# EAGLE board proto (EAGLE 6.6.0)
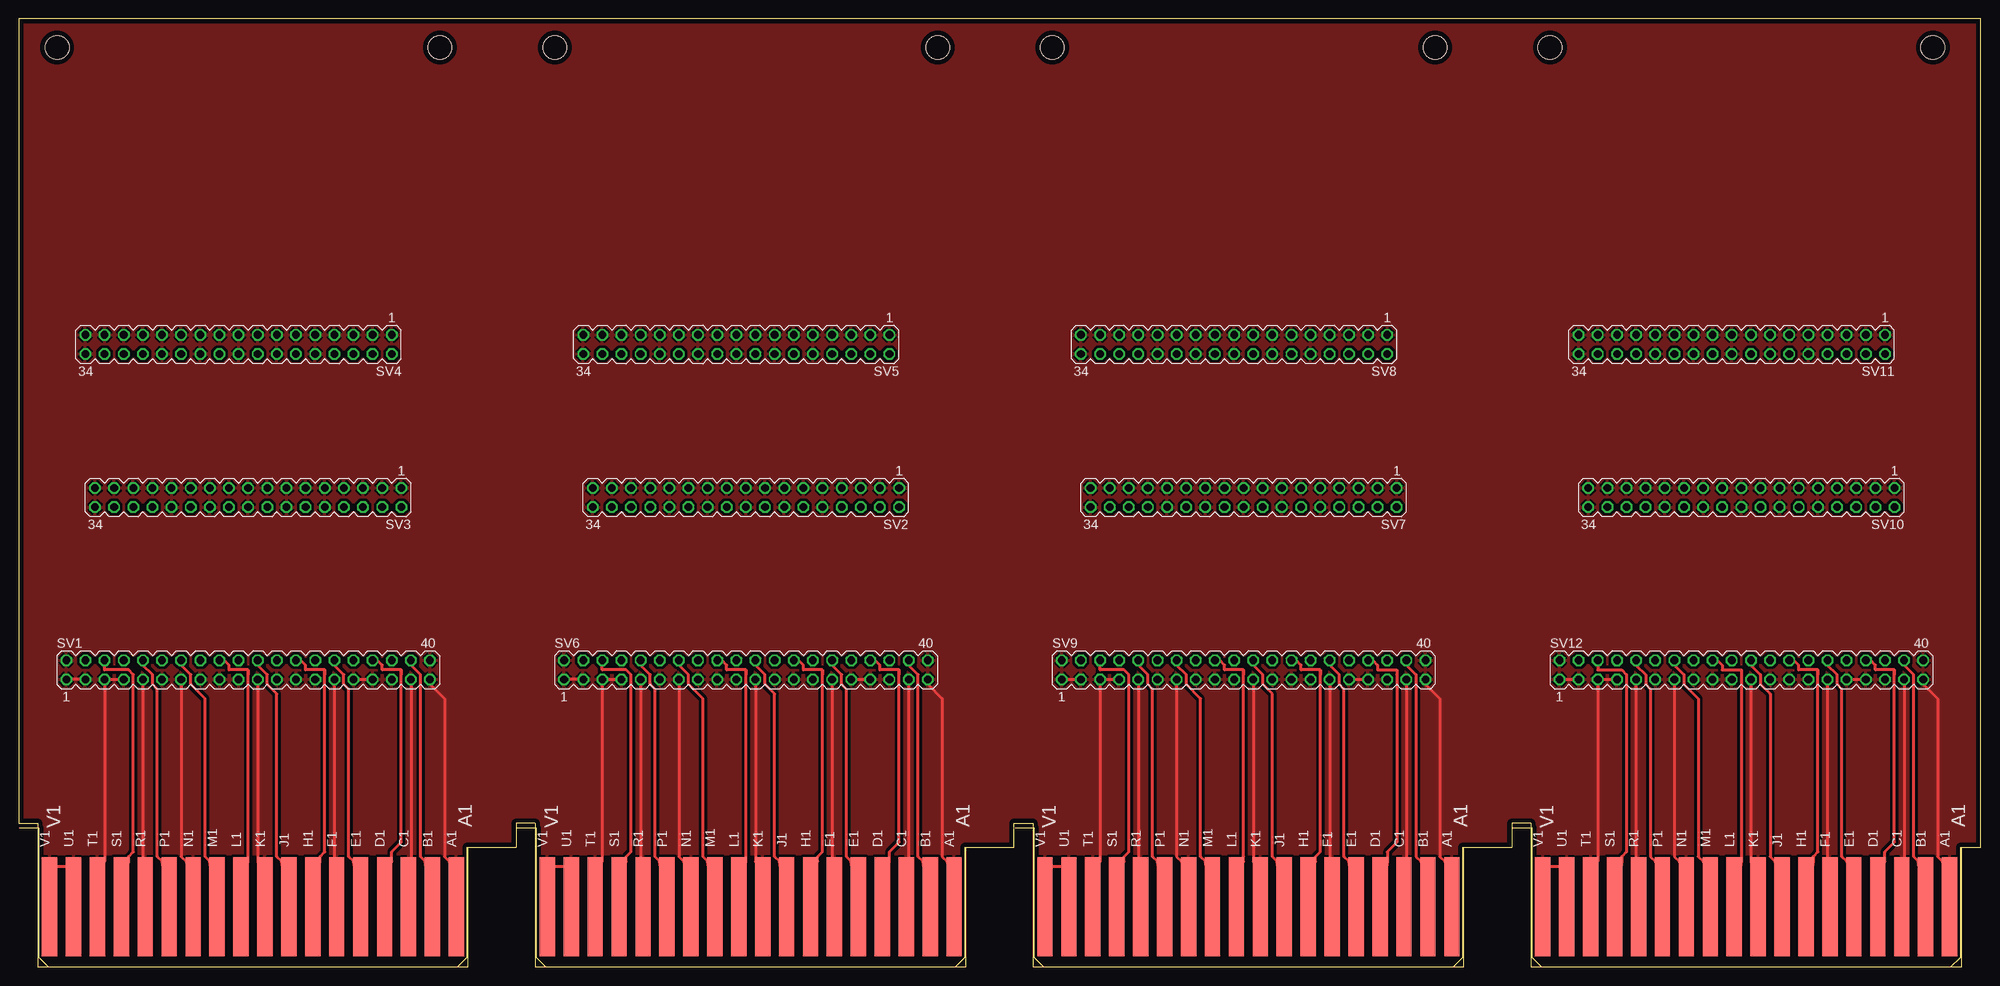
[diagram p0: board, top side]
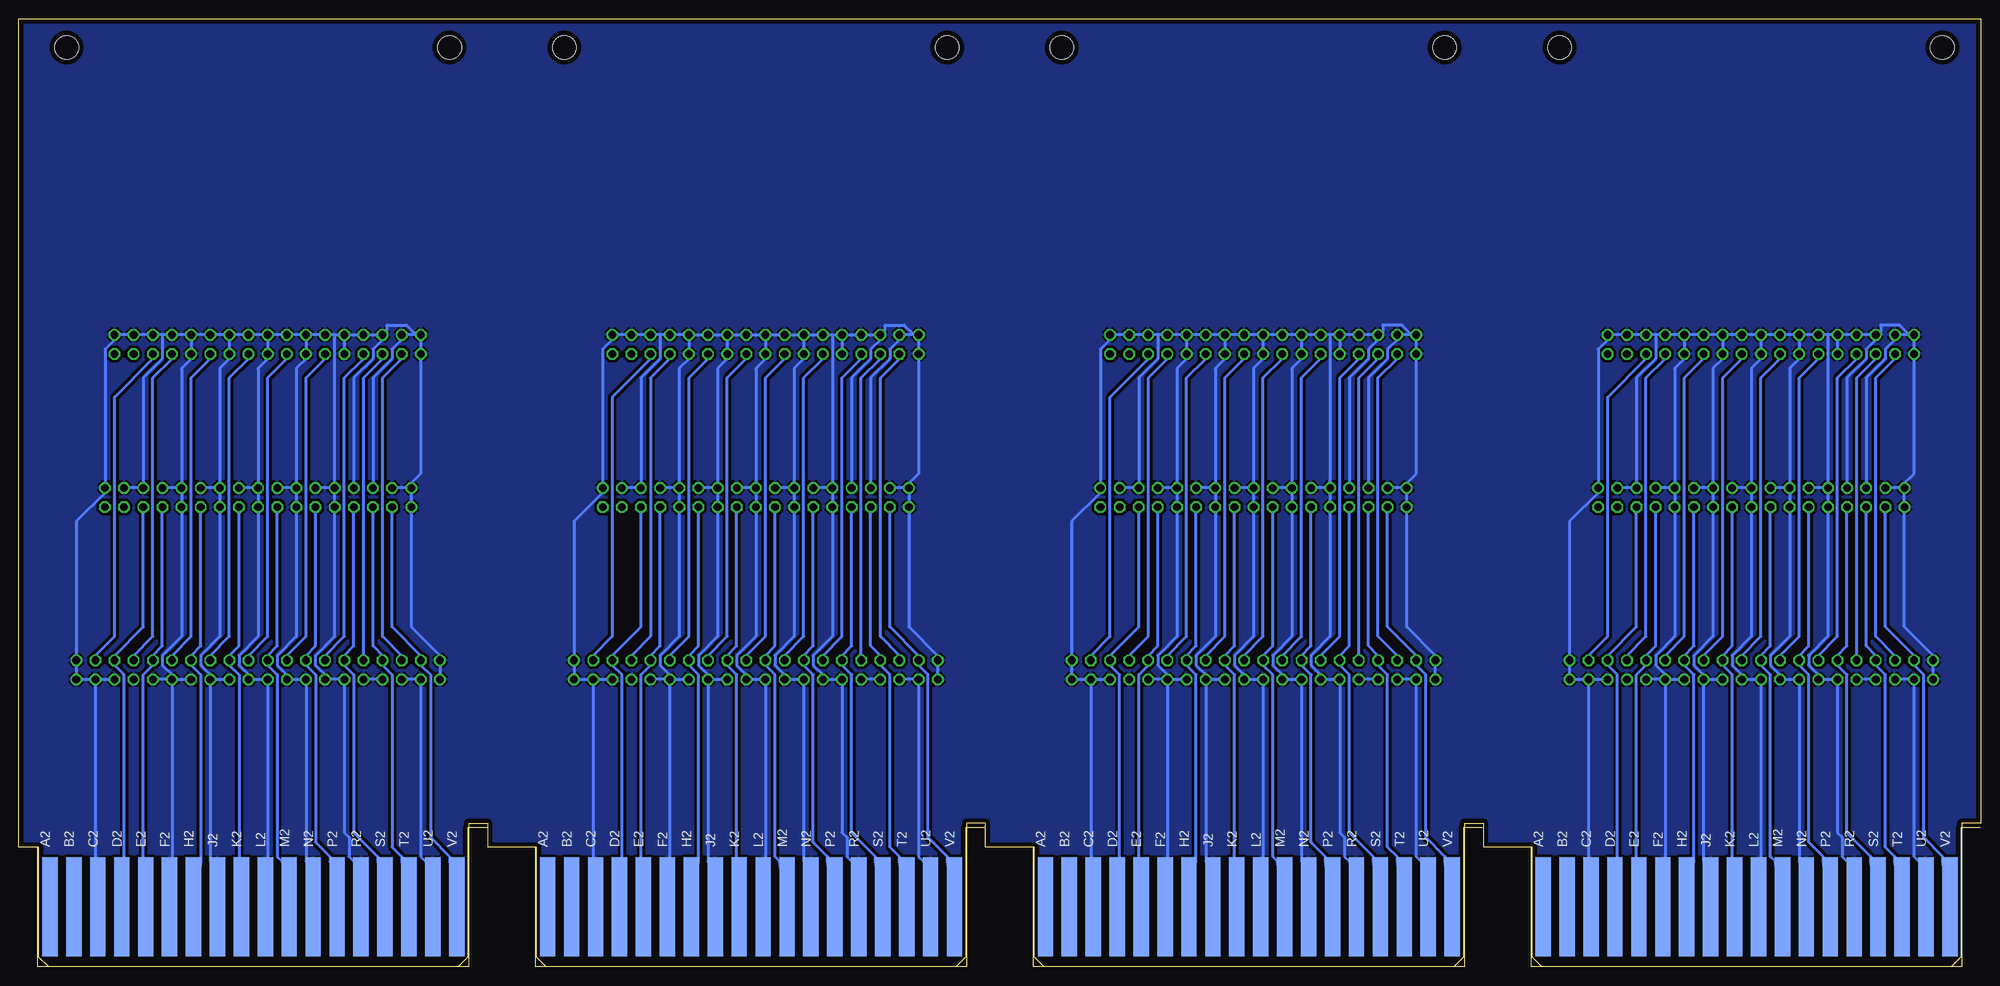
[diagram p1: board, bottom side, seen from below]

Size 260.3 x 125.73 mm. Coordinates in mm from the lower left corner, seen from the top.
Copper layers (1*16): Top 0.035mm / dielectric 1.5mm / Bottom 0.035mm
Design rules "olimex10mil": minimum track width 15mil, minimum drill 24mil, track to track 15mil, track to pad 10mil, pad to pad 10mil, via to via 10mil, smd to smd 10mil, copper to edge 25mil, drill to drill 10mil, minimum pad ring 10mil, minimum via ring 8mil, stop-mask expansion 0mil, vias tented up to drill 0mil, thermal gap 10mil

## Footprints (pad centres in the part's own frame; a part is rotated, then mirrored left to right if it is on the bottom)
DECPROTO = hole 3.175: 203.2,121.92; 254,121.92; 187.96,121.92; 137.16,121.92; 71.171,121.92; 121.971,121.92; 55.931,121.92; 5.131,121.92
MA20-2 = drill 1.016 octagon: 1 -24.13,-1.27; 2 -24.13,1.27; 3 -21.59,-1.27; 4 -21.59,1.27; 5 -19.05,-1.27; 6 -19.05,1.27; 7 -16.51,-1.27; 8 -16.51,1.27; 9 -13.97,-1.27; 10 -13.97,1.27; 11 -11.43,-1.27; 12 -11.43,1.27; 13 -8.89,-1.27; 14 -8.89,1.27; 15 -6.35,-1.27; 16 -6.35,1.27; 17 -3.81,-1.27; 18 -3.81,1.27; 19 -1.27,-1.27; 20 -1.27,1.27; 21 1.27,-1.27; 22 1.27,1.27; 23 3.81,-1.27; 24 3.81,1.27; 25 6.35,-1.27; 26 6.35,1.27; 27 8.89,-1.27; 28 8.89,1.27; 29 11.43,-1.27; 30 11.43,1.27; 31 13.97,-1.27; 32 13.97,1.27; 33 16.51,-1.27; 34 16.51,1.27; 35 19.05,-1.27; 36 19.05,1.27; 37 21.59,-1.27; 38 21.59,1.27; 39 24.13,-1.27; 40 24.13,1.27
MA17-2 = drill 1.016 octagon: 1 -20.32,-1.27; 2 -20.32,1.27; 3 -17.78,-1.27; 4 -17.78,1.27; 5 -15.24,-1.27; 6 -15.24,1.27; 7 -12.7,-1.27; 8 -12.7,1.27; 9 -10.16,-1.27; 10 -10.16,1.27; 11 -7.62,-1.27; 12 -7.62,1.27; 13 -5.08,-1.27; 14 -5.08,1.27; 15 -2.54,-1.27; 16 -2.54,1.27; 17 0,-1.27; 18 0,1.27; 19 2.54,-1.27; 20 2.54,1.27; 21 5.08,-1.27; 22 5.08,1.27; 23 7.62,-1.27; 24 7.62,1.27; 25 10.16,-1.27; 26 10.16,1.27; 27 12.7,-1.27; 28 12.7,1.27; 29 15.24,-1.27; 30 15.24,1.27; 31 17.78,-1.27; 32 17.78,1.27; 33 20.32,-1.27; 34 20.32,1.27
EDGE-CON2 = smd 13.106 x 2.032: A1 7.938,4.128; B1 7.938,7.303; C1 7.938,10.477; D1 7.938,13.652; E1 7.938,16.828; F1 7.938,20.003; H1 7.938,23.177; J1 7.938,26.352; K1 7.938,29.527; L1 7.938,32.703; M1 7.938,35.877; N1 7.938,39.053; P1 7.938,42.227; R1 7.938,45.403; S1 7.938,48.578; T1 7.938,51.752; U1 7.938,54.928; V1 7.938,58.102 | smd 13.106 x 2.032 bottom: A2 7.938,4.128; B2 7.938,7.303; C2 7.938,10.477; D2 7.938,13.652; E2 7.938,16.828; F2 7.938,20.003; H2 7.938,23.177; J2 7.938,26.352; K2 7.938,29.527; L2 7.938,32.703; M2 7.938,35.877; N2 7.938,39.053; P2 7.938,42.227; R2 7.938,45.403; S2 7.938,48.578; T2 7.938,51.752; U2 7.938,54.928; V2 7.938,58.102

## Placement (x,y rotation side)
E$1  [DECPROTO]  -0.05,0 0 top
SV1  [MA20-2]  30.43,39.37 0 top
SV2  [MA17-2]  96.47,62.23 180 top
SV3  [MA17-2]  30.43,62.23 180 top
SV4  [MA17-2]  29.16,82.55 180 top
SV5  [MA17-2]  95.2,82.55 180 top
SV6  [MA20-2]  96.47,39.37 0 top
SV7  [MA17-2]  162.51,62.23 180 top
SV8  [MA17-2]  161.24,82.55 180 top
SV9  [MA20-2]  162.51,39.37 0 top
SV10  [MA17-2]  228.55,62.23 180 top
SV11  [MA17-2]  227.28,82.55 180 top
SV12  [MA20-2]  228.55,39.37 0 top
U$1  [EDGE-CON2]  194.26,0 90 top
U$2  [EDGE-CON2]  62.18,0 90 top
U$3  [EDGE-CON2]  128.22,0 90 top
U$5  [EDGE-CON2]  260.3,0 90 top

## Library data of the parts
E$1 U$1-U$3 U$5 = dec-con
SV1-SV12 = con-lstb

## Nets
-15V: U$2.B2
-15V1: U$3.B2
-15V2: U$1.B2
-15V3: U$5.B2
B1: SV1.38 SV4.6 U$2.B1
B2: SV5.6 SV6.38 U$3.B1
B3: SV8.6 SV9.38 U$1.B1
B4: SV11.6 SV12.38 U$5.B1
D1: SV1.34 SV4.8 U$2.D1
D2: SV1.36 SV3.6 U$2.D2
D3: SV2.6 SV6.36 U$3.D2
D4: SV5.8 SV6.34 U$3.D1
D5: SV7.6 SV9.36 U$1.D2
D6: SV8.8 SV9.34 U$1.D1
D7: SV10.6 SV12.36 U$5.D2
D8: SV11.8 SV12.34 U$5.D1
E1: SV1.30 SV4.12 U$2.E1
E2: SV1.32 SV3.8 U$2.E2
E3: SV2.8 SV6.32 U$3.E2
E4: SV5.12 SV6.30 U$3.E1
E5: SV7.8 SV9.32 U$1.E2
E6: SV8.12 SV9.30 U$1.E1
E7: SV10.8 SV12.32 U$5.E2
E8: SV11.12 SV12.30 U$5.E1
GND: SV1.1 SV1.2 SV1.3 SV1.5 SV1.7 SV1.9 SV1.11 SV1.13 SV1.15 SV1.17 SV1.19 SV1.21 SV1.23 SV1.25 SV1.27 SV1.29 SV1.31 SV1.33 SV1.35 SV1.37 SV1.39 SV1.40 SV2.1 SV2.3 SV2.5 SV2.7 SV2.9 SV2.10 SV2.11 SV2.13 SV2.14 SV2.15 SV2.17 SV2.18 SV2.19 SV2.21 SV2.22 SV2.23 SV2.25 SV2.26 SV2.27 SV2.29 SV2.31 SV2.33 SV2.34 SV3.1 SV3.3 SV3.5 SV3.7 SV3.9 SV3.10 SV3.11 SV3.13 SV3.14 SV3.15 SV3.17 SV3.18 SV3.19 SV3.21 SV3.22 SV3.23 SV3.25 SV3.26 SV3.27 SV3.29 SV3.31 SV3.33 SV3.34 SV4.1 SV4.3 SV4.5 SV4.7 SV4.9 SV4.10 SV4.11 SV4.13 SV4.14 SV4.15 SV4.17 SV4.18 SV4.19 SV4.21 SV4.22 SV4.23 SV4.25 SV4.26 SV4.27 SV4.29 SV4.31 SV4.33 SV4.34 SV5.1 SV5.3 SV5.5 SV5.7 SV5.9 SV5.10 SV5.11 SV5.13 SV5.14 SV5.15 SV5.17 SV5.18 SV5.19 SV5.21 SV5.22 SV5.23 SV5.25 SV5.26 SV5.27 SV5.29 SV5.31 SV5.33 SV5.34 SV6.1 SV6.2 SV6.3 SV6.5 SV6.7 SV6.9 SV6.11 SV6.13 SV6.15 SV6.17 SV6.19 SV6.21 SV6.23 SV6.25 SV6.27 SV6.29 SV6.31 SV6.33 SV6.35 SV6.37 SV6.39 SV6.40 SV7.1 SV7.3 SV7.5 SV7.7 SV7.9 SV7.10 SV7.11 SV7.13 SV7.14 SV7.15 SV7.17 SV7.18 SV7.19 SV7.21 SV7.22 SV7.23 SV7.25 SV7.26 SV7.27 SV7.29 SV7.31 SV7.33 SV7.34 SV8.1 SV8.3 SV8.5 SV8.7 SV8.9 SV8.10 SV8.11 SV8.13 SV8.14 SV8.15 SV8.17 SV8.18 SV8.19 SV8.21 SV8.22 SV8.23 SV8.25 SV8.26 SV8.27 SV8.29 SV8.31 SV8.33 SV8.34 SV9.1 SV9.2 SV9.3 SV9.5 SV9.7 SV9.9 SV9.11 SV9.13 SV9.15 SV9.17 SV9.19 SV9.21 SV9.23 SV9.25 SV9.27 SV9.29 SV9.31 SV9.33 SV9.35 SV9.37 SV9.39 SV9.40 SV10.1 SV10.3 SV10.5 SV10.7 SV10.9 SV10.10 SV10.11 SV10.13 SV10.14 SV10.15 SV10.17 SV10.18 SV10.19 SV10.21 SV10.22 SV10.23 SV10.25 SV10.26 SV10.27 SV10.29 SV10.31 SV10.33 SV10.34 SV11.1 SV11.3 SV11.5 SV11.7 SV11.9 SV11.10 SV11.11 SV11.13 SV11.14 SV11.15 SV11.17 SV11.18 SV11.19 SV11.21 SV11.22 SV11.23 SV11.25 SV11.26 SV11.27 SV11.29 SV11.31 SV11.33 SV11.34 SV12.1 SV12.2 SV12.3 SV12.5 SV12.7 SV12.9 SV12.11 SV12.13 SV12.15 SV12.17 SV12.19 SV12.21 SV12.23 SV12.25 SV12.27 SV12.29 SV12.31 SV12.33 SV12.35 SV12.37 SV12.39 SV12.40 U$1.A1 U$1.C1 U$1.C2 U$1.F1 U$1.F2 U$1.J2 U$1.K1 U$1.L2 U$1.N1 U$1.N2 U$1.R1 U$1.R2 U$1.T1 U$1.U1 U$1.U2 U$1.V1 U$2.A1 U$2.C1 U$2.C2 U$2.F1 U$2.F2 U$2.J2 U$2.K1 U$2.L2 U$2.N1 U$2.N2 U$2.R1 U$2.R2 U$2.T1 U$2.U1 U$2.U2 U$2.V1 U$3.A1 U$3.C1 U$3.C2 U$3.F1 U$3.F2 U$3.J2 U$3.K1 U$3.L2 U$3.N1 U$3.N2 U$3.R1 U$3.R2 U$3.T1 U$3.U1 U$3.U2 U$3.V1 U$5.A1 U$5.C1 U$5.C2 U$5.F1 U$5.F2 U$5.J2 U$5.K1 U$5.L2 U$5.N1 U$5.N2 U$5.R1 U$5.R2 U$5.T1 U$5.U1 U$5.U2 U$5.V1
H1: SV1.26 SV4.16 U$2.H1
H2: SV1.28 SV3.12 U$2.H2
H3: SV2.12 SV6.28 U$3.H2
H4: SV5.16 SV6.26 U$3.H1
H5: SV7.12 SV9.28 U$1.H2
H6: SV8.16 SV9.26 U$1.H1
H7: SV10.12 SV12.28 U$5.H2
H8: SV11.16 SV12.26 U$5.H1
J1: SV1.22 SV4.20 U$2.J1
J2: SV5.20 SV6.22 U$3.J1
J3: SV8.20 SV9.22 U$1.J1
J4: SV11.20 SV12.22 U$5.J1
K1: SV2.16 SV6.24 U$3.K2
K2: SV1.24 SV3.16 U$2.K2
K3: SV7.16 SV9.24 U$1.K2
K4: SV10.16 SV12.24 U$5.K2
L1: SV1.18 SV4.24 U$2.L1
L2: SV5.24 SV6.18 U$3.L1
L3: SV8.24 SV9.18 U$1.L1
L4: SV11.24 SV12.18 U$5.L1
M1: SV1.14 SV4.28 U$2.M1
M2: SV1.20 SV3.20 U$2.M2
M3: SV2.20 SV6.20 U$3.M2
M4: SV5.28 SV6.14 U$3.M1
M5: SV7.20 SV9.20 U$1.M2
M6: SV8.28 SV9.14 U$1.M1
M7: SV10.20 SV12.20 U$5.M2
M8: SV11.28 SV12.14 U$5.M1
P1: SV1.10 SV4.30 U$2.P1
P2: SV1.16 SV3.24 U$2.P2
P3: SV2.24 SV6.16 U$3.P2
P4: SV5.30 SV6.10 U$3.P1
P5: SV7.24 SV9.16 U$1.P2
P6: SV8.30 SV9.10 U$1.P1
P7: SV10.24 SV12.16 U$5.P2
P8: SV11.30 SV12.10 U$5.P1
S1: SV1.6 SV4.32 U$2.S1
S2: SV1.12 SV3.28 U$2.S2
S3: SV2.28 SV6.12 U$3.S2
S4: SV5.32 SV6.6 U$3.S1
S5: SV7.28 SV9.12 U$1.S2
S6: SV8.32 SV9.6 U$1.S1
S7: SV10.28 SV12.12 U$5.S2
S8: SV11.32 SV12.6 U$5.S1
T1: SV2.30 SV6.8 U$3.T2
T2: SV1.8 SV3.30 U$2.T2
T3: SV7.30 SV9.8 U$1.T2
T4: SV10.30 SV12.8 U$5.T2
V1: SV2.32 SV6.4 U$3.V2
V2: SV1.4 SV3.32 U$2.V2
V3: SV7.32 SV9.4 U$1.V2
V4: SV10.32 SV12.4 U$5.V2
VCC: U$2.A2
VCC1: U$3.A2
VCC2: U$1.A2
VCC3: U$5.A2

## Tracks (layer width: path | path; a pad name or v marks a point on that pad's centre or on a via)
B1
  Top 0.381: SV1.38 52.02,40.01 53.29,38.74 53.29,14.61 53.92,13.97 U$2.B1
  Bottom 0.381: SV1.38 52.02,41.28 49.48,43.82 49.48,75.57 44.4,80.65 SV4.6
B2
  Top 0.381: SV6.38 118.06,40.01 119.33,38.74 119.33,14.61 119.96,13.97 U$3.B1
  Bottom 0.381: SV6.38 118.06,41.28 115.52,43.82 115.52,75.57 110.44,80.65 SV5.6
B3
  Top 0.381: SV9.38 184.1,40.01 185.37,38.74 185.37,14.61 186,13.97 U$1.B1
  Bottom 0.381: SV9.38 184.1,41.28 181.56,43.82 181.56,75.57 176.48,80.65 SV8.6
B4
  Top 0.381: SV12.38 250.14,40.01 251.41,38.74 251.41,14.61 252.04,13.97 U$5.B1
  Bottom 0.381: SV12.38 250.14,41.28 247.6,43.82 247.6,75.57 242.52,80.65 SV11.6
D1
  Top 0.381: 50.75,39.37 50.75,16.51 49.48,15.24 49.48,13.97 U$2.D1 | 50.75,39.37 50.75,38.74 | 50.75,39.37 48.21,39.37 48.21,40.01 47.57,40.64 SV1.34
  Bottom 0.381: SV1.34 46.94,41.28 44.4,43.82 44.4,78.11 41.86,80.65 SV4.8
D2
  Bottom 0.381: SV3.6 45.67,60.33 45.67,45.09 49.48,41.28 SV1.36 49.48,40.01 48.21,38.74 48.21,13.97 U$2.D2
D3
  Bottom 0.381: SV2.6 111.71,60.33 111.71,45.09 115.52,41.28 SV6.36 115.52,40.01 114.25,38.74 114.25,13.97 U$3.D2
D4
  Top 0.381: 116.79,39.37 116.79,16.51 115.52,15.24 115.52,13.97 U$3.D1 | 116.79,39.37 116.79,38.74 | 116.79,39.37 114.25,39.37 114.25,40.01 113.61,40.64 SV6.34
  Bottom 0.381: SV6.34 112.98,41.28 110.44,43.82 110.44,78.11 107.9,80.65 SV5.8
D5
  Bottom 0.381: SV7.6 177.75,60.33 177.75,45.09 181.56,41.28 SV9.36 181.56,40.01 180.29,38.74 180.29,13.97 U$1.D2
D6
  Top 0.381: 182.83,39.37 182.83,16.51 181.56,15.24 181.56,13.97 U$1.D1 | 182.83,39.37 182.83,38.74 | 182.83,39.37 180.29,39.37 180.29,40.01 179.65,40.64 SV9.34
  Bottom 0.381: SV9.34 179.02,41.28 176.48,43.82 176.48,78.11 173.94,80.65 SV8.8
D7
  Bottom 0.381: SV10.6 243.79,60.33 243.79,45.09 247.6,41.28 SV12.36 247.6,40.01 246.33,38.74 246.33,13.97 U$5.D2
D8
  Top 0.381: 248.87,39.37 248.87,16.51 247.6,15.24 247.6,13.97 U$5.D1 | 248.87,39.37 248.87,38.74 | 248.87,39.37 246.33,39.37 246.33,40.01 245.69,40.64 SV12.34
  Bottom 0.381: SV12.34 245.06,41.28 242.52,43.82 242.52,78.11 239.98,80.65 SV11.8
E1
  Top 0.381: SV1.30 41.86,40.01 43.13,38.74 43.13,37.47 43.76,36.83 43.76,14.61 44.4,13.97 U$2.E1
  Bottom 0.381: SV1.30 41.86,41.28 39.32,43.82 39.32,78.11 36.78,80.65 SV4.12
E2
  Bottom 0.381: SV3.8 43.13,60.33 43.13,42.55 44.4,41.28 SV1.32 44.4,40.01 45.67,38.74 45.67,13.97 U$2.E2
E3
  Bottom 0.381: SV2.8 109.17,60.33 109.17,42.55 110.44,41.28 SV6.32 110.44,40.01 111.71,38.74 111.71,13.97 U$3.E2
E4
  Top 0.381: SV6.30 107.9,40.01 109.17,38.74 109.17,37.47 109.8,36.83 109.8,14.61 110.44,13.97 U$3.E1
  Bottom 0.381: SV6.30 107.9,41.28 105.36,43.82 105.36,78.11 102.82,80.65 SV5.12
E5
  Bottom 0.381: SV7.8 175.21,60.33 175.21,42.55 176.48,41.28 SV9.32 176.48,40.01 177.75,38.74 177.75,13.97 U$1.E2
E6
  Top 0.381: SV9.30 173.94,40.01 175.21,38.74 175.21,37.47 175.84,36.83 175.84,14.61 176.48,13.97 U$1.E1
  Bottom 0.381: SV9.30 173.94,41.28 171.4,43.82 171.4,78.11 168.86,80.65 SV8.12
E7
  Bottom 0.381: SV10.8 241.25,60.33 241.25,42.55 242.52,41.28 SV12.32 242.52,40.01 243.79,38.74 243.79,13.97 U$5.E2
E8
  Top 0.381: SV12.30 239.98,40.01 241.25,38.74 241.25,37.47 241.88,36.83 241.88,14.61 242.52,13.97 U$5.E1
  Bottom 0.381: SV12.30 239.98,41.28 237.44,43.82 237.44,78.11 234.9,80.65 SV11.12
GND
  Top 0.381: 11.38,13.97 11.38,37.47 SV1.5 12.01,38.1 13.28,38.1 SV1.7 | SV1.9 16.46,37.47 16.46,13.97 U$2.R1 | SV1.3 8.2,38.1 6.93,38.1 SV1.1 | 52.02,13.97 52.02,37.47 SV1.37 | SV1.39 54.56,37.47 56.46,35.56 56.46,14.61 57.1,13.97 U$2.A1 | SV1.21 31.7,37.47 31.7,13.97 U$2.K1 | SV1.33 46.3,38.1 45.03,38.1 SV1.31 | SV1.29 41.86,37.47 41.86,13.97 U$2.F1 | SV1.13 21.54,37.47 21.54,14.61 22.17,13.97 U$2.N1 | 3.95,13.97 3.76,13.97 U$2.V1 5.03,13.34 6.3,13.34 U$2.U1 | U$2.T1 10.11,13.97 10.24,13.97 | U$2.C1 51.38,13.97 51.5,13.97 | 77.42,13.97 77.42,37.47 SV6.5 78.05,38.1 79.32,38.1 SV6.7 | SV6.9 82.5,37.47 82.5,13.97 U$3.R1 | SV6.3 74.24,38.1 72.97,38.1 SV6.1 | 118.06,13.97 118.06,37.47 SV6.37 | SV6.39 120.6,37.47 122.5,35.56 122.5,14.61 123.14,13.97 U$3.A1 | SV6.21 97.74,37.47 97.74,13.97 U$3.K1 | SV6.33 112.34,38.1 111.07,38.1 SV6.31 | SV6.29 107.9,37.47 107.9,13.97 U$3.F1 | SV6.13 87.58,37.47 87.58,14.61 88.21,13.97 U$3.N1 | 69.99,13.97 69.8,13.97 U$3.V1 71.07,13.34 72.34,13.34 U$3.U1 | U$3.T1 76.15,13.97 76.28,13.97 | U$3.C1 117.42,13.97 117.54,13.97 | 143.46,13.97 143.46,37.47 SV9.5 144.09,38.1 145.36,38.1 SV9.7 | SV9.9 148.54,37.47 148.54,13.97 U$1.R1 | SV9.3 140.28,38.1 139.01,38.1 SV9.1 | 184.1,13.97 184.1,37.47 SV9.37 | SV9.39 186.64,37.47 188.54,35.56 188.54,14.61 189.18,13.97 U$1.A1 | SV9.21 163.78,37.47 163.78,13.97 U$1.K1 | SV9.33 178.38,38.1 177.11,38.1 SV9.31 | SV9.29 173.94,37.47 173.94,13.97 U$1.F1 | SV9.13 153.62,37.47 153.62,14.61 154.25,13.97 U$1.N1 | 136.03,13.97 135.84,13.97 U$1.V1 137.11,13.34 138.38,13.34 U$1.U1 | U$1.T1 142.19,13.97 142.32,13.97 | U$1.C1 183.46,13.97 183.58,13.97
  Top 0.381: 209.5,13.97 209.5,37.47 SV12.5 210.13,38.1 211.4,38.1 SV12.7 | SV12.9 214.58,37.47 214.58,13.97 U$5.R1 | SV12.3 206.32,38.1 205.05,38.1 SV12.1 | 250.14,13.97 250.14,37.47 SV12.37 | SV12.39 252.68,37.47 254.58,35.56 254.58,14.61 255.22,13.97 U$5.A1 | SV12.21 229.82,37.47 229.82,13.97 U$5.K1 | SV12.33 244.42,38.1 243.15,38.1 SV12.31 | SV12.29 239.98,37.47 239.98,13.97 U$5.F1 | SV12.13 219.66,37.47 219.66,14.61 220.29,13.97 U$5.N1 | 202.07,13.97 201.88,13.97 U$5.V1 203.15,13.34 204.42,13.34 U$5.U1 | U$5.T1 208.23,13.97 208.36,13.97 | U$5.C1 249.5,13.97 249.62,13.97
  Bottom 0.381: SV1.5 10.74,38.1 9.47,38.1 SV1.3 8.84,37.47 8.84,14.61 8.2,13.97 | SV1.9 15.82,38.1 14.55,38.1 SV1.7 | SV1.1 6.3,38.74 6.3,40.01 SV1.2 6.3,41.28 10.11,45.09 10.11,60.33 SV3.34 10.11,61.6 10.11,62.87 SV3.33 | SV3.31 12.01,63.5 10.74,63.5 SV3.33 | SV4.33 8.84,83.19 8.84,81.92 SV4.34 8.84,80.65 8.84,65.41 10.11,64.14 SV3.33 | SV3.29 15.19,64.14 15.19,78.11 12.65,80.65 12.65,81.92 11.38,83.19 SV4.31 10.74,83.82 9.47,83.82 | SV4.33 9.47,83.82 | SV1.37 52.65,38.1 53.92,38.1 SV1.39 54.56,38.74 54.56,40.01 SV1.40 54.56,41.28 54.56,59.06 50.75,62.87 SV3.1 50.75,64.14 50.75,81.92 49.48,83.19 SV4.1 48.84,83.82 47.57,83.82 SV4.3 46.3,83.82 45.03,83.82 SV4.5 43.76,83.82 43.13,83.82 | SV1.35 50.11,38.1 51.38,38.1 SV1.37 | 52.02,13.97 52.02,37.47 SV1.37 | SV1.29 42.49,38.1 43.76,38.1 SV1.31 | SV1.27 39.95,38.1 41.22,38.1 SV1.29 | SV1.29 41.86,37.47 41.86,13.97 U$2.F1 | SV1.25 36.14,38.1 34.87,38.1 SV1.23 | 36.78,13.97 36.78,37.47 SV1.25 | 24.08,13.97 24.08,37.47 SV1.15 24.71,38.1 25.98,38.1 SV1.17 26.62,38.74 27.89,40.01 27.89,41.28 25.35,43.82 25.35,60.33 SV3.22 25.35,61.6 25.35,62.87 SV3.21 | SV3.13 35.51,62.87 35.51,61.6 SV3.14 35.51,60.33 35.51,43.82 38.05,41.28 38.05,40.01 36.78,38.74 SV1.25 | SV3.11 37.41,63.5 36.14,63.5 SV3.13 | SV4.13 34.24,83.19 34.24,81.92 SV4.14 34.24,80.65 35.51,79.38 35.51,64.14 SV3.13 | SV4.13 33.6,83.82 32.33,83.82 SV4.15 31.06,83.82 29.79,83.82 SV4.17 | SV3.17 30.43,62.87 30.43,61.6 SV3.18 30.43,60.33 30.43,43.82 32.97,41.28 32.97,40.01 31.7,38.74 SV1.21 31.06,38.1 29.79,38.1 SV1.19 29.16,37.47 29.16,13.97 U$2.L2 | SV3.15 32.33,63.5 31.06,63.5 SV3.17
  Bottom 0.381: SV4.17 29.16,83.19 29.16,81.92 SV4.18 29.16,80.65 30.43,79.38 30.43,64.14 SV3.17 | SV4.17 28.52,83.82 27.25,83.82 SV4.19 25.98,83.82 24.71,83.82 SV4.21 | SV3.3 47.57,63.5 46.3,63.5 SV3.5 45.67,64.14 45.67,78.11 43.13,80.65 43.13,83.82 | 43.13,83.82 42.49,83.82 SV4.7 41.22,83.82 39.95,83.82 SV4.9 | SV3.9 40.59,62.87 40.59,61.6 SV3.10 40.59,60.33 40.59,43.82 43.13,41.28 43.13,40.01 41.86,38.74 SV1.29 | SV3.7 42.49,63.5 41.22,63.5 SV3.9 | SV4.9 39.32,83.19 39.32,81.92 SV4.10 39.32,80.65 40.59,79.38 40.59,64.14 SV3.9 | SV4.9 38.68,83.82 37.41,83.82 SV4.11 36.14,83.82 34.87,83.82 SV4.13 | SV3.23 22.17,63.5 20.9,63.5 SV3.25 | SV3.25 20.27,62.87 20.27,61.6 SV3.26 20.27,60.33 20.27,43.82 22.81,41.28 22.81,40.01 21.54,38.74 SV1.13 20.9,38.1 19.63,38.1 SV1.11 19,37.47 19,17.78 18.36,17.15 18.36,14.61 17.73,13.97 | SV4.26 19,81.92 19,83.19 SV4.25 | SV4.25 18.36,83.82 17.09,83.82 SV4.27 15.82,83.82 14.55,83.82 SV4.29 | SV3.27 17.73,64.14 17.73,78.11 15.19,80.65 15.19,81.92 13.92,83.19 SV4.29 | SV3.19 27.25,63.5 25.98,63.5 SV3.21 | SV4.21 24.08,83.19 24.08,81.92 SV4.22 24.08,80.65 25.35,79.38 25.35,64.14 SV3.21 | SV4.21 23.44,83.82 22.17,83.82 SV4.23 20.9,83.82 20.27,83.82 | 20.27,83.82 19.63,83.82 SV4.25 | 20.27,83.82 20.27,64.14 SV3.25 | 9.47,83.82 10.74,85.09 13.28,85.09 13.28,83.82 SV4.29 | SV4.33 9.47,83.82 | U$2.U1 6.93,13.97 7.01,13.97 | U$2.R1 16.46,13.97 16.59,13.97 | U$2.N1 22.81,13.97 22.94,13.97 | U$2.J2 35.51,13.97 35.64,13.97 | U$2.C1 51.38,13.97 51.49,13.97 | SV6.5 76.78,38.1 75.51,38.1 SV6.3 74.88,37.47 74.88,14.61 74.24,13.97 | SV6.9 81.86,38.1 80.59,38.1 SV6.7
  Bottom 0.381: SV6.1 72.34,38.74 72.34,40.01 SV6.2 72.34,41.28 76.15,45.09 76.15,60.33 SV2.34 76.15,61.6 76.15,62.87 SV2.33 | SV2.31 78.05,63.5 76.78,63.5 SV2.33 | SV5.33 74.88,83.19 74.88,81.92 SV5.34 74.88,80.65 74.88,65.41 76.15,64.14 SV2.33 | SV2.29 81.23,64.14 81.23,78.11 78.69,80.65 78.69,81.92 77.42,83.19 SV5.31 76.78,83.82 75.51,83.82 | SV5.33 75.51,83.82 | SV6.37 118.69,38.1 119.96,38.1 SV6.39 120.6,38.74 120.6,40.01 SV6.40 120.6,41.28 120.6,59.06 116.79,62.87 SV2.1 116.79,64.14 116.79,81.92 115.52,83.19 SV5.1 114.88,83.82 113.61,83.82 SV5.3 112.34,83.82 111.07,83.82 SV5.5 109.8,83.82 109.17,83.82 | SV6.35 116.15,38.1 117.42,38.1 SV6.37 | 118.06,13.97 118.06,37.47 SV6.37 | SV6.29 108.53,38.1 109.8,38.1 SV6.31 | SV6.27 105.99,38.1 107.26,38.1 SV6.29 | SV6.29 107.9,37.47 107.9,13.97 U$3.F1 | SV6.25 102.18,38.1 100.91,38.1 SV6.23 | 102.82,13.97 102.82,37.47 SV6.25 | 90.12,13.97 90.12,37.47 SV6.15 90.75,38.1 92.02,38.1 SV6.17 92.66,38.74 93.93,40.01 93.93,41.28 91.39,43.82 91.39,60.33 SV2.22 91.39,61.6 91.39,62.87 SV2.21 | SV2.13 101.55,62.87 101.55,61.6 SV2.14 101.55,60.33 101.55,43.82 104.09,41.28 104.09,40.01 102.82,38.74 SV6.25 | SV2.11 103.45,63.5 102.18,63.5 SV2.13 | SV5.13 100.28,83.19 100.28,81.92 SV5.14 100.28,80.65 101.55,79.38 101.55,64.14 SV2.13 | SV5.13 99.64,83.82 98.37,83.82 SV5.15 97.1,83.82 95.83,83.82 SV5.17 | SV2.17 96.47,62.87 96.47,61.6 SV2.18 96.47,60.33 96.47,43.82 99.01,41.28 99.01,40.01 97.74,38.74 SV6.21 97.1,38.1 95.83,38.1 SV6.19 95.2,37.47 95.2,13.97 U$3.L2 | SV2.15 98.37,63.5 97.1,63.5 SV2.17 | SV5.17 95.2,83.19 95.2,81.92 SV5.18 95.2,80.65 96.47,79.38 96.47,64.14 SV2.17
  Bottom 0.381: SV5.17 94.56,83.82 93.29,83.82 SV5.19 92.02,83.82 90.75,83.82 SV5.21 | SV2.3 113.61,63.5 112.34,63.5 SV2.5 111.71,64.14 111.71,78.11 109.17,80.65 109.17,83.82 | 109.17,83.82 108.53,83.82 SV5.7 107.26,83.82 105.99,83.82 SV5.9 | SV2.9 106.63,62.87 106.63,61.6 SV2.10 106.63,60.33 106.63,43.82 109.17,41.28 109.17,40.01 107.9,38.74 SV6.29 | SV2.7 108.53,63.5 107.26,63.5 SV2.9 | SV5.9 105.36,83.19 105.36,81.92 SV5.10 105.36,80.65 106.63,79.38 106.63,64.14 SV2.9 | SV5.9 104.72,83.82 103.45,83.82 SV5.11 102.18,83.82 100.91,83.82 SV5.13 | SV2.23 88.21,63.5 86.94,63.5 SV2.25 | SV2.25 86.31,62.87 86.31,61.6 SV2.26 86.31,60.33 86.31,43.82 88.85,41.28 88.85,40.01 87.58,38.74 SV6.13 86.94,38.1 85.67,38.1 SV6.11 85.04,37.47 85.04,17.78 84.4,17.15 84.4,14.61 83.77,13.97 | SV5.26 85.04,81.92 85.04,83.19 SV5.25 | SV5.25 84.4,83.82 83.13,83.82 SV5.27 81.86,83.82 80.59,83.82 SV5.29 | SV2.27 83.77,64.14 83.77,78.11 81.23,80.65 81.23,81.92 79.96,83.19 SV5.29 | SV2.19 93.29,63.5 92.02,63.5 SV2.21 | SV5.21 90.12,83.19 90.12,81.92 SV5.22 90.12,80.65 91.39,79.38 91.39,64.14 SV2.21 | SV5.21 89.48,83.82 88.21,83.82 SV5.23 86.94,83.82 86.31,83.82 | 86.31,83.82 85.67,83.82 SV5.25 | 86.31,83.82 86.31,64.14 SV2.25 | 75.51,83.82 76.78,85.09 79.32,85.09 79.32,83.82 SV5.29 | SV5.33 75.51,83.82 | U$3.U1 72.97,13.97 73.05,13.97 | U$3.R1 82.5,13.97 82.63,13.97 | U$3.N1 88.85,13.97 88.98,13.97 | U$3.J2 101.55,13.97 101.68,13.97 | U$3.C1 117.42,13.97 117.53,13.97 | SV9.5 142.82,38.1 141.55,38.1 SV9.3 140.92,37.47 140.92,14.61 140.28,13.97 | SV9.9 147.9,38.1 146.63,38.1 SV9.7 | SV9.1 138.38,38.74 138.38,40.01 SV9.2 138.38,41.28 142.19,45.09 142.19,60.33 SV7.34 142.19,61.6 142.19,62.87 SV7.33
  Bottom 0.381: SV7.31 144.09,63.5 142.82,63.5 SV7.33 | SV8.33 140.92,83.19 140.92,81.92 SV8.34 140.92,80.65 140.92,65.41 142.19,64.14 SV7.33 | SV7.29 147.27,64.14 147.27,78.11 144.73,80.65 144.73,81.92 143.46,83.19 SV8.31 142.82,83.82 141.55,83.82 | 141.55,83.82 SV8.33 | SV9.37 184.73,38.1 186,38.1 SV9.39 186.64,38.74 186.64,40.01 SV9.40 186.64,41.28 186.64,59.06 182.83,62.87 SV7.1 182.83,64.14 182.83,81.92 181.56,83.19 SV8.1 180.92,83.82 179.65,83.82 SV8.3 178.38,83.82 177.11,83.82 SV8.5 175.84,83.82 175.21,83.82 | SV9.35 182.19,38.1 183.46,38.1 SV9.37 | 184.1,13.97 184.1,37.47 SV9.37 | SV9.29 174.57,38.1 175.84,38.1 SV9.31 | SV9.27 172.03,38.1 173.3,38.1 SV9.29 | SV9.29 173.94,37.47 173.94,13.97 U$1.F1 | SV9.25 168.22,38.1 166.95,38.1 SV9.23 | 168.86,13.97 168.86,37.47 SV9.25 | 156.16,13.97 156.16,37.47 SV9.15 156.79,38.1 158.06,38.1 SV9.17 158.7,38.74 159.97,40.01 159.97,41.28 157.43,43.82 157.43,60.33 SV7.22 157.43,61.6 157.43,62.87 SV7.21 | SV7.13 167.59,62.87 167.59,61.6 SV7.14 167.59,60.33 167.59,43.82 170.13,41.28 170.13,40.01 168.86,38.74 SV9.25 | SV7.11 169.49,63.5 168.22,63.5 SV7.13 | SV8.13 166.32,83.19 166.32,81.92 SV8.14 166.32,80.65 167.59,79.38 167.59,64.14 SV7.13 | SV8.13 165.68,83.82 164.41,83.82 SV8.15 163.14,83.82 161.87,83.82 SV8.17 | SV7.17 162.51,62.87 162.51,61.6 SV7.18 162.51,60.33 162.51,43.82 165.05,41.28 165.05,40.01 163.78,38.74 SV9.21 163.14,38.1 161.87,38.1 SV9.19 161.24,37.47 161.24,13.97 U$1.L2 | SV7.15 164.41,63.5 163.14,63.5 SV7.17 | SV8.17 161.24,83.19 161.24,81.92 SV8.18 161.24,80.65 162.51,79.38 162.51,64.14 SV7.17
  Bottom 0.381: SV8.17 160.6,83.82 159.33,83.82 SV8.19 158.06,83.82 156.79,83.82 SV8.21 | SV7.3 179.65,63.5 178.38,63.5 SV7.5 177.75,64.14 177.75,78.11 175.21,80.65 175.21,83.82 | 175.21,83.82 174.57,83.82 SV8.7 173.3,83.82 172.03,83.82 SV8.9 | SV7.9 172.67,62.87 172.67,61.6 SV7.10 172.67,60.33 172.67,43.82 175.21,41.28 175.21,40.01 173.94,38.74 SV9.29 | SV7.7 174.57,63.5 173.3,63.5 SV7.9 | SV8.9 171.4,83.19 171.4,81.92 SV8.10 171.4,80.65 172.67,79.38 172.67,64.14 SV7.9 | SV8.9 170.76,83.82 169.49,83.82 SV8.11 168.22,83.82 166.95,83.82 SV8.13 | SV7.23 154.25,63.5 152.98,63.5 SV7.25 | SV7.25 152.35,62.87 152.35,61.6 SV7.26 152.35,60.33 152.35,43.82 154.89,41.28 154.89,40.01 153.62,38.74 SV9.13 152.98,38.1 151.71,38.1 SV9.11 151.08,37.47 151.08,17.78 150.44,17.15 150.44,14.61 149.81,13.97 | SV8.26 151.08,81.92 151.08,83.19 SV8.25 | SV8.25 150.44,83.82 149.17,83.82 SV8.27 147.9,83.82 146.63,83.82 SV8.29 | SV7.27 149.81,64.14 149.81,78.11 147.27,80.65 147.27,81.92 146,83.19 SV8.29 | SV7.19 159.33,63.5 158.06,63.5 SV7.21 | SV8.21 156.16,83.19 156.16,81.92 SV8.22 156.16,80.65 157.43,79.38 157.43,64.14 SV7.21 | SV8.21 155.52,83.82 154.25,83.82 SV8.23 152.98,83.82 152.35,83.82 | 152.35,83.82 151.71,83.82 SV8.25 | 152.35,83.82 152.35,64.14 SV7.25 | 141.55,83.82 142.82,85.09 145.36,85.09 145.36,83.82 SV8.29 | 141.55,83.82 SV8.33 | U$1.U1 139.01,13.97 139.09,13.97 | U$1.R1 148.54,13.97 148.67,13.97 | U$1.N1 154.89,13.97 155.02,13.97 | U$1.J2 167.59,13.97 167.72,13.97 | U$1.C1 183.46,13.97 183.57,13.97 | SV12.5 208.86,38.1 207.59,38.1 SV12.3 206.96,37.47 206.96,14.61 206.32,13.97
  Bottom 0.381: SV12.9 213.94,38.1 212.67,38.1 SV12.7 | SV12.1 204.42,38.74 204.42,40.01 SV12.2 204.42,41.28 208.23,45.09 208.23,60.33 SV10.34 208.23,61.6 208.23,62.87 SV10.33 | SV10.31 210.13,63.5 208.86,63.5 SV10.33 | SV11.33 206.96,83.19 206.96,81.92 SV11.34 206.96,80.65 206.96,65.41 208.23,64.14 SV10.33 | SV10.29 213.31,64.14 213.31,78.11 210.77,80.65 210.77,81.92 209.5,83.19 SV11.31 208.86,83.82 207.59,83.82 | 207.59,83.82 SV11.33 | SV12.37 250.77,38.1 252.04,38.1 SV12.39 252.68,38.74 252.68,40.01 SV12.40 252.68,41.28 252.68,59.06 248.87,62.87 SV10.1 248.87,64.14 248.87,81.92 247.6,83.19 SV11.1 246.96,83.82 245.69,83.82 SV11.3 244.42,83.82 243.15,83.82 SV11.5 241.88,83.82 241.25,83.82 | SV12.35 248.23,38.1 249.5,38.1 SV12.37 | 250.14,13.97 250.14,37.47 SV12.37 | SV12.29 240.61,38.1 241.88,38.1 SV12.31 | SV12.27 238.07,38.1 239.34,38.1 SV12.29 | SV12.29 239.98,37.47 239.98,13.97 U$5.F1 | SV12.25 234.26,38.1 232.99,38.1 SV12.23 | 234.9,13.97 234.9,37.47 SV12.25 | 222.2,13.97 222.2,37.47 SV12.15 222.83,38.1 224.1,38.1 SV12.17 224.74,38.74 226.01,40.01 226.01,41.28 223.47,43.82 223.47,60.33 SV10.22 223.47,61.6 223.47,62.87 SV10.21 | SV10.13 233.63,62.87 233.63,61.6 SV10.14 233.63,60.33 233.63,43.82 236.17,41.28 236.17,40.01 234.9,38.74 SV12.25 | SV10.11 235.53,63.5 234.26,63.5 SV10.13 | SV11.13 232.36,83.19 232.36,81.92 SV11.14 232.36,80.65 233.63,79.38 233.63,64.14 SV10.13 | SV11.13 231.72,83.82 230.45,83.82 SV11.15 229.18,83.82 227.91,83.82 SV11.17 | SV10.17 228.55,62.87 228.55,61.6 SV10.18 228.55,60.33 228.55,43.82 231.09,41.28 231.09,40.01 229.82,38.74 SV12.21 229.18,38.1 227.91,38.1 SV12.19 227.28,37.47 227.28,13.97 U$5.L2
  Bottom 0.381: SV10.15 230.45,63.5 229.18,63.5 SV10.17 | SV11.17 227.28,83.19 227.28,81.92 SV11.18 227.28,80.65 228.55,79.38 228.55,64.14 SV10.17 | SV11.17 226.64,83.82 225.37,83.82 SV11.19 224.1,83.82 222.83,83.82 SV11.21 | SV10.3 245.69,63.5 244.42,63.5 SV10.5 243.79,64.14 243.79,78.11 241.25,80.65 241.25,83.82 | 241.25,83.82 240.61,83.82 SV11.7 239.34,83.82 238.07,83.82 SV11.9 | SV10.9 238.71,62.87 238.71,61.6 SV10.10 238.71,60.33 238.71,43.82 241.25,41.28 241.25,40.01 239.98,38.74 SV12.29 | SV10.7 240.61,63.5 239.34,63.5 SV10.9 | SV11.9 237.44,83.19 237.44,81.92 SV11.10 237.44,80.65 238.71,79.38 238.71,64.14 SV10.9 | SV11.9 236.8,83.82 235.53,83.82 SV11.11 234.26,83.82 232.99,83.82 SV11.13 | SV10.23 220.29,63.5 219.02,63.5 SV10.25 | SV10.25 218.39,62.87 218.39,61.6 SV10.26 218.39,60.33 218.39,43.82 220.93,41.28 220.93,40.01 219.66,38.74 SV12.13 219.02,38.1 217.75,38.1 SV12.11 217.12,37.47 217.12,17.78 216.48,17.15 216.48,14.61 215.85,13.97 | SV11.26 217.12,81.92 217.12,83.19 SV11.25 | SV11.25 216.48,83.82 215.21,83.82 SV11.27 213.94,83.82 212.67,83.82 SV11.29 | SV10.27 215.85,64.14 215.85,78.11 213.31,80.65 213.31,81.92 212.04,83.19 SV11.29 | SV10.19 225.37,63.5 224.1,63.5 SV10.21 | SV11.21 222.2,83.19 222.2,81.92 SV11.22 222.2,80.65 223.47,79.38 223.47,64.14 SV10.21 | SV11.21 221.56,83.82 220.29,83.82 SV11.23 219.02,83.82 218.39,83.82 | 218.39,83.82 217.75,83.82 SV11.25 | 218.39,83.82 218.39,64.14 SV10.25 | 207.59,83.82 208.86,85.09 211.4,85.09 211.4,83.82 SV11.29 | 207.59,83.82 SV11.33 | U$5.U1 205.05,13.97 205.13,13.97 | U$5.R1 214.58,13.97 214.71,13.97
  Bottom 0.381: U$5.N1 220.93,13.97 221.06,13.97 | U$5.J2 233.63,13.97 233.76,13.97 | U$5.C1 249.5,13.97 249.61,13.97
  pour Bottom (isolate 0.305): 2.49,13.97 2.49,19.05 -0.05,19.05 -0.05,125.73 65.99,125.73 65.99,16.51 59.64,16.51 59.64,13.97
  pour Top (isolate 0.305): 2.49,13.97 2.49,19.05 -0.05,19.05 -0.05,125.73 65.99,125.73 65.99,16.51 59.64,16.51 59.64,13.97
  pour Bottom (isolate 0.305): 68.53,13.97 68.53,19.05 65.99,19.05 65.99,125.73 132.03,125.73 132.03,16.51 125.68,16.51 125.68,13.97
  pour Top (isolate 0.305): 68.53,13.97 68.53,19.05 65.99,19.05 65.99,125.73 132.03,125.73 132.03,16.51 125.68,16.51 125.68,13.97
  pour Bottom (isolate 0.305): 134.57,13.97 134.57,19.05 132.03,19.05 132.03,125.73 198.07,125.73 198.07,16.51 191.72,16.51 191.72,13.97
  pour Top (isolate 0.305): 134.57,13.97 134.57,19.05 132.03,19.05 132.03,125.73 198.07,125.73 198.07,16.51 191.72,16.51 191.72,13.97
  pour Bottom (isolate 0.305): 200.61,13.97 200.61,19.05 198.07,19.05 198.07,125.73 260.3,125.73 260.3,16.51 257.76,16.51 257.76,13.97
  pour Top (isolate 0.305): 200.61,13.97 200.61,19.05 198.07,19.05 198.07,125.73 260.3,125.73 260.3,16.51 257.76,16.51 257.76,13.97
H1
  Top 0.381: 40.59,39.37 40.59,15.24 39.95,14.61 39.95,13.97 U$2.H1 | 40.59,39.37 40.59,38.74 | 40.59,39.37 38.05,39.37 38.05,40.01 37.41,40.64 SV1.26
  Bottom 0.381: SV1.26 36.78,41.28 34.24,43.82 34.24,78.11 31.7,80.65 SV4.16
H2
  Bottom 0.381: SV3.12 38.05,60.33 38.05,42.55 39.32,41.28 SV1.28 39.32,40.01 38.05,38.74 38.05,13.97 U$2.H2
H3
  Bottom 0.381: SV2.12 104.09,60.33 104.09,42.55 105.36,41.28 SV6.28 105.36,40.01 104.09,38.74 104.09,13.97 U$3.H2
H4
  Top 0.381: 106.63,39.37 106.63,15.24 105.99,14.61 105.99,13.97 U$3.H1 | 106.63,39.37 106.63,38.74 | 106.63,39.37 104.09,39.37 104.09,40.01 103.45,40.64 SV6.26
  Bottom 0.381: SV6.26 102.82,41.28 100.28,43.82 100.28,78.11 97.74,80.65 SV5.16
H5
  Bottom 0.381: SV7.12 170.13,60.33 170.13,42.55 171.4,41.28 SV9.28 171.4,40.01 170.13,38.74 170.13,13.97 U$1.H2
H6
  Top 0.381: 172.67,39.37 172.67,15.24 172.03,14.61 172.03,13.97 U$1.H1 | 172.67,39.37 172.67,38.74 | 172.67,39.37 170.13,39.37 170.13,40.01 169.49,40.64 SV9.26
  Bottom 0.381: SV9.26 168.86,41.28 166.32,43.82 166.32,78.11 163.78,80.65 SV8.16
H7
  Bottom 0.381: SV10.12 236.17,60.33 236.17,42.55 237.44,41.28 SV12.28 237.44,40.01 236.17,38.74 236.17,13.97 U$5.H2
H8
  Top 0.381: 238.71,39.37 238.71,15.24 238.07,14.61 238.07,13.97 U$5.H1 | 238.71,39.37 238.71,38.74 | 238.71,39.37 236.17,39.37 236.17,40.01 235.53,40.64 SV12.26
  Bottom 0.381: SV12.26 234.9,41.28 232.36,43.82 232.36,78.11 229.82,80.65 SV11.16
J1
  Top 0.381: SV1.22 31.7,40.01 32.97,38.74 32.97,37.47 34.24,36.2 34.24,14.61 34.87,13.97 U$2.J1
  Bottom 0.381: SV1.22 31.7,41.28 29.16,43.82 29.16,78.11 26.62,80.65 SV4.20
J2
  Top 0.381: SV6.22 97.74,40.01 99.01,38.74 99.01,37.47 100.28,36.2 100.28,14.61 100.91,13.97 U$3.J1
  Bottom 0.381: SV6.22 97.74,41.28 95.2,43.82 95.2,78.11 92.66,80.65 SV5.20
J3
  Top 0.381: SV9.22 163.78,40.01 165.05,38.74 165.05,37.47 166.32,36.2 166.32,14.61 166.95,13.97 U$1.J1
  Bottom 0.381: SV9.22 163.78,41.28 161.24,43.82 161.24,78.11 158.7,80.65 SV8.20
J4
  Top 0.381: SV12.22 229.82,40.01 231.09,38.74 231.09,37.47 232.36,36.2 232.36,14.61 232.99,13.97 U$5.J1
  Bottom 0.381: SV12.22 229.82,41.28 227.28,43.82 227.28,78.11 224.74,80.65 SV11.20
K1
  Bottom 0.381: SV2.16 99.01,60.33 99.01,42.55 100.28,41.28 SV6.24 100.28,40.01 99.01,38.74 99.01,13.97 U$3.K2
K2
  Bottom 0.381: SV3.16 32.97,60.33 32.97,42.55 34.24,41.28 SV1.24 34.24,40.01 32.97,38.74 32.97,13.97 U$2.K2
K3
  Bottom 0.381: SV7.16 165.05,60.33 165.05,42.55 166.32,41.28 SV9.24 166.32,40.01 165.05,38.74 165.05,13.97 U$1.K2
K4
  Bottom 0.381: SV10.16 231.09,60.33 231.09,42.55 232.36,41.28 SV12.24 232.36,40.01 231.09,38.74 231.09,13.97 U$5.K2
L1
  Top 0.381: 30.43,39.37 30.43,14.61 30.43,13.97 U$2.L1 | 30.43,39.37 30.43,38.74 | 30.43,39.37 27.89,39.37 27.89,40.01 27.25,40.64 SV1.18
  Bottom 0.381: SV1.18 26.62,41.28 24.08,43.82 24.08,78.11 21.54,80.65 SV4.24
L2
  Top 0.381: 96.47,39.37 96.47,14.61 96.47,13.97 U$3.L1 | 96.47,39.37 96.47,38.74 | 96.47,39.37 93.93,39.37 93.93,40.01 93.29,40.64 SV6.18
  Bottom 0.381: SV6.18 92.66,41.28 90.12,43.82 90.12,78.11 87.58,80.65 SV5.24
L3
  Top 0.381: 162.51,39.37 162.51,14.61 162.51,13.97 U$1.L1 | 162.51,39.37 162.51,38.74 | 162.51,39.37 159.97,39.37 159.97,40.01 159.33,40.64 SV9.18
  Bottom 0.381: SV9.18 158.7,41.28 156.16,43.82 156.16,78.11 153.62,80.65 SV8.24
L4
  Top 0.381: 228.55,39.37 228.55,14.61 228.55,13.97 U$5.L1 | 228.55,39.37 228.55,38.74 | 228.55,39.37 226.01,39.37 226.01,40.01 225.37,40.64 SV12.18
  Bottom 0.381: SV12.18 224.74,41.28 222.2,43.82 222.2,78.11 219.66,80.65 SV11.24
M1
  Top 0.381: SV1.14 21.54,40.01 22.81,38.74 22.81,37.47 24.71,35.56 24.71,14.61 25.35,13.97 U$2.M1
  Bottom 0.381: SV1.14 21.54,41.28 19,43.82 19,78.11 16.46,80.65 SV4.28
M2
  Bottom 0.381: SV3.20 27.89,60.33 27.89,42.55 29.16,41.28 SV1.20 29.16,40.01 27.89,38.74 27.89,14.61 27.25,13.97 U$2.M2
M3
  Bottom 0.381: SV2.20 93.93,60.33 93.93,42.55 95.2,41.28 SV6.20 95.2,40.01 93.93,38.74 93.93,14.61 93.29,13.97 U$3.M2
M4
  Top 0.381: SV6.14 87.58,40.01 88.85,38.74 88.85,37.47 90.75,35.56 90.75,14.61 91.39,13.97 U$3.M1
  Bottom 0.381: SV6.14 87.58,41.28 85.04,43.82 85.04,78.11 82.5,80.65 SV5.28
M5
  Bottom 0.381: SV7.20 159.97,60.33 159.97,42.55 161.24,41.28 SV9.20 161.24,40.01 159.97,38.74 159.97,14.61 159.33,13.97 U$1.M2
M6
  Top 0.381: SV9.14 153.62,40.01 154.89,38.74 154.89,37.47 156.79,35.56 156.79,14.61 157.43,13.97 U$1.M1
  Bottom 0.381: SV9.14 153.62,41.28 151.08,43.82 151.08,78.11 148.54,80.65 SV8.28
M7
  Bottom 0.381: SV10.20 226.01,60.33 226.01,42.55 227.28,41.28 SV12.20 227.28,40.01 226.01,38.74 226.01,14.61 225.37,13.97 U$5.M2
M8
  Top 0.381: SV12.14 219.66,40.01 220.93,38.74 220.93,37.47 222.83,35.56 222.83,14.61 223.47,13.97 U$5.M1
  Bottom 0.381: SV12.14 219.66,41.28 217.12,43.82 217.12,78.11 214.58,80.65 SV11.28
P1
  Top 0.381: SV1.10 16.46,40.01 17.73,38.74 17.73,37.47 18.36,36.83 18.36,14.61 19,13.97 U$2.P1
  Bottom 0.381: SV1.10 16.46,41.28 16.46,78.11 13.92,80.65 SV4.30
P2
  Bottom 0.381: SV3.24 22.81,60.33 22.81,42.55 24.08,41.28 SV1.16 24.08,40.01 22.81,38.74 22.81,16.51 20.9,14.61 20.9,13.97 U$2.P2
P3
  Bottom 0.381: SV2.24 88.85,60.33 88.85,42.55 90.12,41.28 SV6.16 90.12,40.01 88.85,38.74 88.85,16.51 86.94,14.61 86.94,13.97 U$3.P2
P4
  Top 0.381: SV6.10 82.5,40.01 83.77,38.74 83.77,37.47 84.4,36.83 84.4,14.61 85.04,13.97 U$3.P1
  Bottom 0.381: SV6.10 82.5,41.28 82.5,78.11 79.96,80.65 SV5.30
P5
  Bottom 0.381: SV7.24 154.89,60.33 154.89,42.55 156.16,41.28 SV9.16 156.16,40.01 154.89,38.74 154.89,16.51 152.98,14.61 152.98,13.97 U$1.P2
P6
  Top 0.381: SV9.10 148.54,40.01 149.81,38.74 149.81,37.47 150.44,36.83 150.44,14.61 151.08,13.97 U$1.P1
  Bottom 0.381: SV9.10 148.54,41.28 148.54,78.11 146,80.65 SV8.30
P7
  Bottom 0.381: SV10.24 220.93,60.33 220.93,42.55 222.2,41.28 SV12.16 222.2,40.01 220.93,38.74 220.93,16.51 219.02,14.61 219.02,13.97 U$5.P2
P8
  Top 0.381: SV12.10 214.58,40.01 215.85,38.74 215.85,37.47 216.48,36.83 216.48,14.61 217.12,13.97 U$5.P1
  Bottom 0.381: SV12.10 214.58,41.28 214.58,78.11 212.04,80.65 SV11.30
S1
  Top 0.381: SV1.6 11.38,40.01 11.38,39.37 14.55,39.37 15.19,38.74 15.19,15.24 14.55,14.61 14.55,13.97 U$2.S1
  Bottom 0.381: SV1.6 11.38,41.28 13.92,43.82 13.92,78.11 11.38,80.65 SV4.32
S2
  Bottom 0.381: SV3.28 17.73,60.33 17.73,42.55 19,41.28 SV1.12 19,40.01 17.73,38.74 17.73,17.78 14.55,14.61 14.55,13.97 U$2.S2
S3
  Bottom 0.381: SV2.28 83.77,60.33 83.77,42.55 85.04,41.28 SV6.12 85.04,40.01 83.77,38.74 83.77,17.78 80.59,14.61 80.59,13.97 U$3.S2
S4
  Top 0.381: SV6.6 77.42,40.01 77.42,39.37 80.59,39.37 81.23,38.74 81.23,15.24 80.59,14.61 80.59,13.97 U$3.S1
  Bottom 0.381: SV6.6 77.42,41.28 79.96,43.82 79.96,78.11 77.42,80.65 SV5.32
S5
  Bottom 0.381: SV7.28 149.81,60.33 149.81,42.55 151.08,41.28 SV9.12 151.08,40.01 149.81,38.74 149.81,17.78 146.63,14.61 146.63,13.97 U$1.S2
S6
  Top 0.381: SV9.6 143.46,40.01 143.46,39.37 146.63,39.37 147.27,38.74 147.27,15.24 146.63,14.61 146.63,13.97 U$1.S1
  Bottom 0.381: SV9.6 143.46,41.28 146,43.82 146,78.11 143.46,80.65 SV8.32
S7
  Bottom 0.381: SV10.28 215.85,60.33 215.85,42.55 217.12,41.28 SV12.12 217.12,40.01 215.85,38.74 215.85,17.78 212.67,14.61 212.67,13.97 U$5.S2
S8
  Top 0.381: SV12.6 209.5,40.01 209.5,39.37 212.67,39.37 213.31,38.74 213.31,15.24 212.67,14.61 212.67,13.97 U$5.S1
  Bottom 0.381: SV12.6 209.5,41.28 212.04,43.82 212.04,78.11 209.5,80.65 SV11.32
T1
  Bottom 0.381: SV2.30 81.23,60.33 81.23,42.55 79.96,41.28 SV6.8 79.96,40.01 78.69,38.74 78.69,15.88 77.42,14.61 77.42,13.97 U$3.T2
T2
  Bottom 0.381: SV3.30 15.19,60.33 15.19,42.55 13.92,41.28 SV1.8 13.92,40.01 12.65,38.74 12.65,15.88 11.38,14.61 11.38,13.97 U$2.T2
T3
  Bottom 0.381: SV7.30 147.27,60.33 147.27,42.55 146,41.28 SV9.8 146,40.01 144.73,38.74 144.73,15.88 143.46,14.61 143.46,13.97 U$1.T2
T4
  Bottom 0.381: SV10.30 213.31,60.33 213.31,42.55 212.04,41.28 SV12.8 212.04,40.01 210.77,38.74 210.77,15.88 209.5,14.61 209.5,13.97 U$5.T2
V1
  Bottom 0.381: SV2.32 78.69,60.33 78.69,45.09 74.88,41.28 SV6.4 74.88,40.01 73.61,38.74 73.61,17.15 71.07,14.61 71.07,13.97 U$3.V2
V2
  Bottom 0.381: SV3.32 12.65,60.33 12.65,45.09 8.84,41.28 SV1.4 8.84,40.01 7.57,38.74 7.57,17.15 5.03,14.61 5.03,13.97 U$2.V2
V3
  Bottom 0.381: SV7.32 144.73,60.33 144.73,45.09 140.92,41.28 SV9.4 140.92,40.01 139.65,38.74 139.65,17.15 137.11,14.61 137.11,13.97 U$1.V2
V4
  Bottom 0.381: SV10.32 210.77,60.33 210.77,45.09 206.96,41.28 SV12.4 206.96,40.01 205.69,38.74 205.69,17.15 203.15,14.61 203.15,13.97 U$5.V2

## Text on the board
tNames: A1 | A1 | A1 | A1 | V1 | V1 | V1 | V1
tValues: Side 1 | Side 1 | Side 1 | Side 1 | Side 2 | Side 2 | Side 2 | Side 2 | BC08J | BC08J | BC08J | BC08J